# Altium PCB Board.PcbDoc
Units mm, origin at the board's own origin, x right, y up, seen from the top; angles counter-clockwise.
Board outline 38.73 x 19.68 mm, 2 copper layers (Top Layer, Bottom Layer); 19 components, 13 nets, 44 pads, 2 vias.
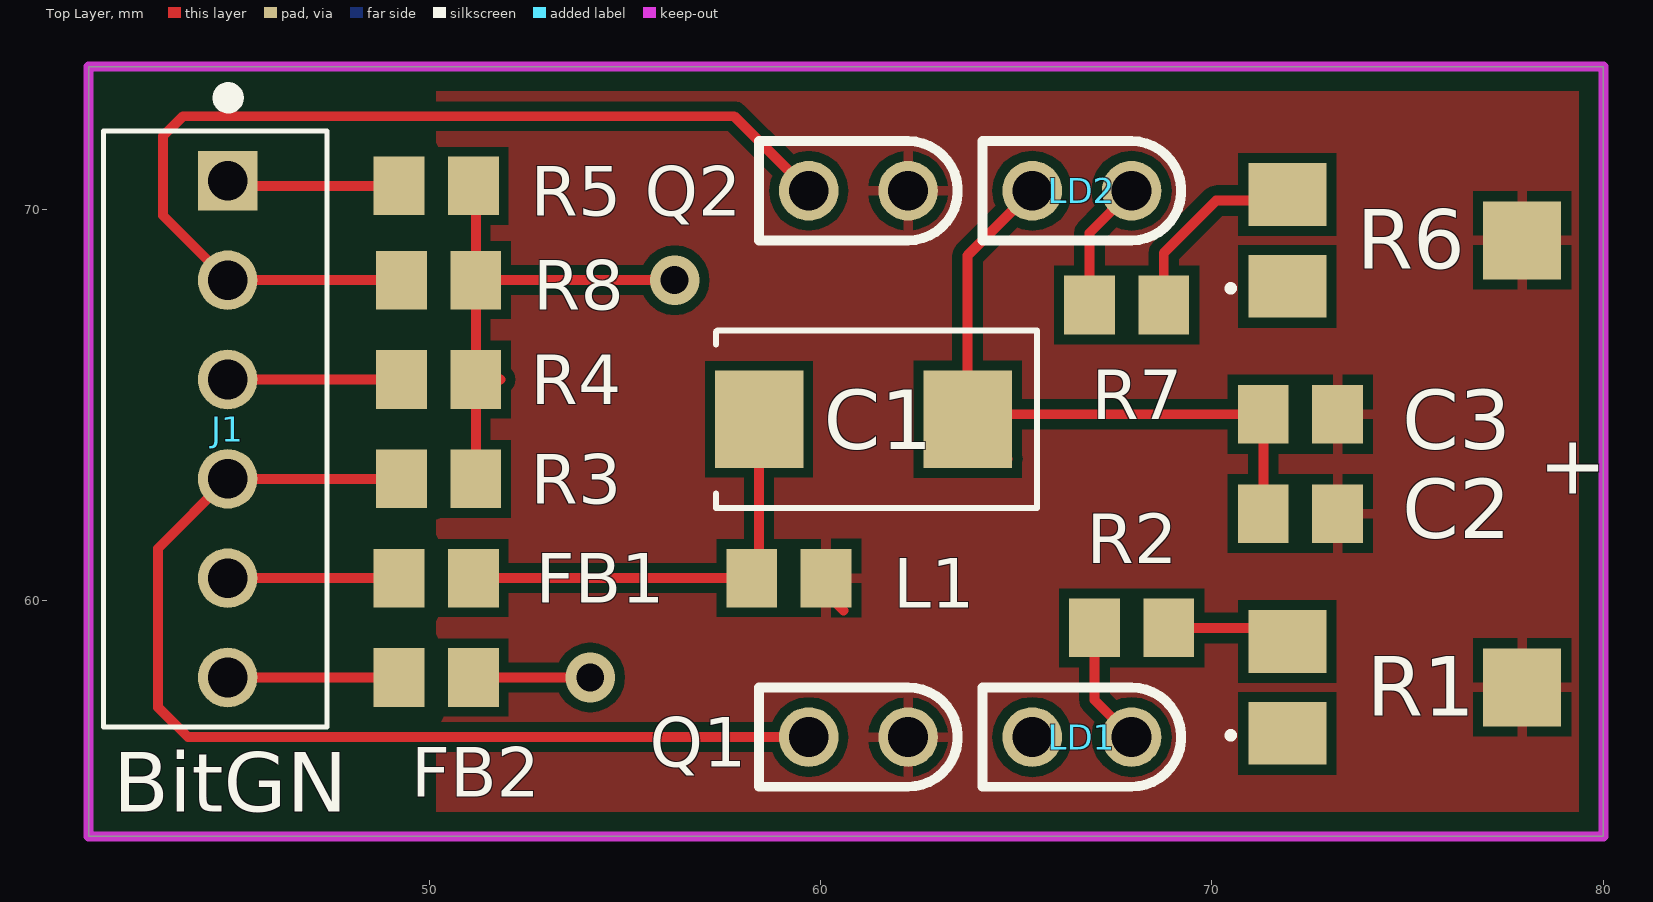
[diagram p0: Top Layer view]
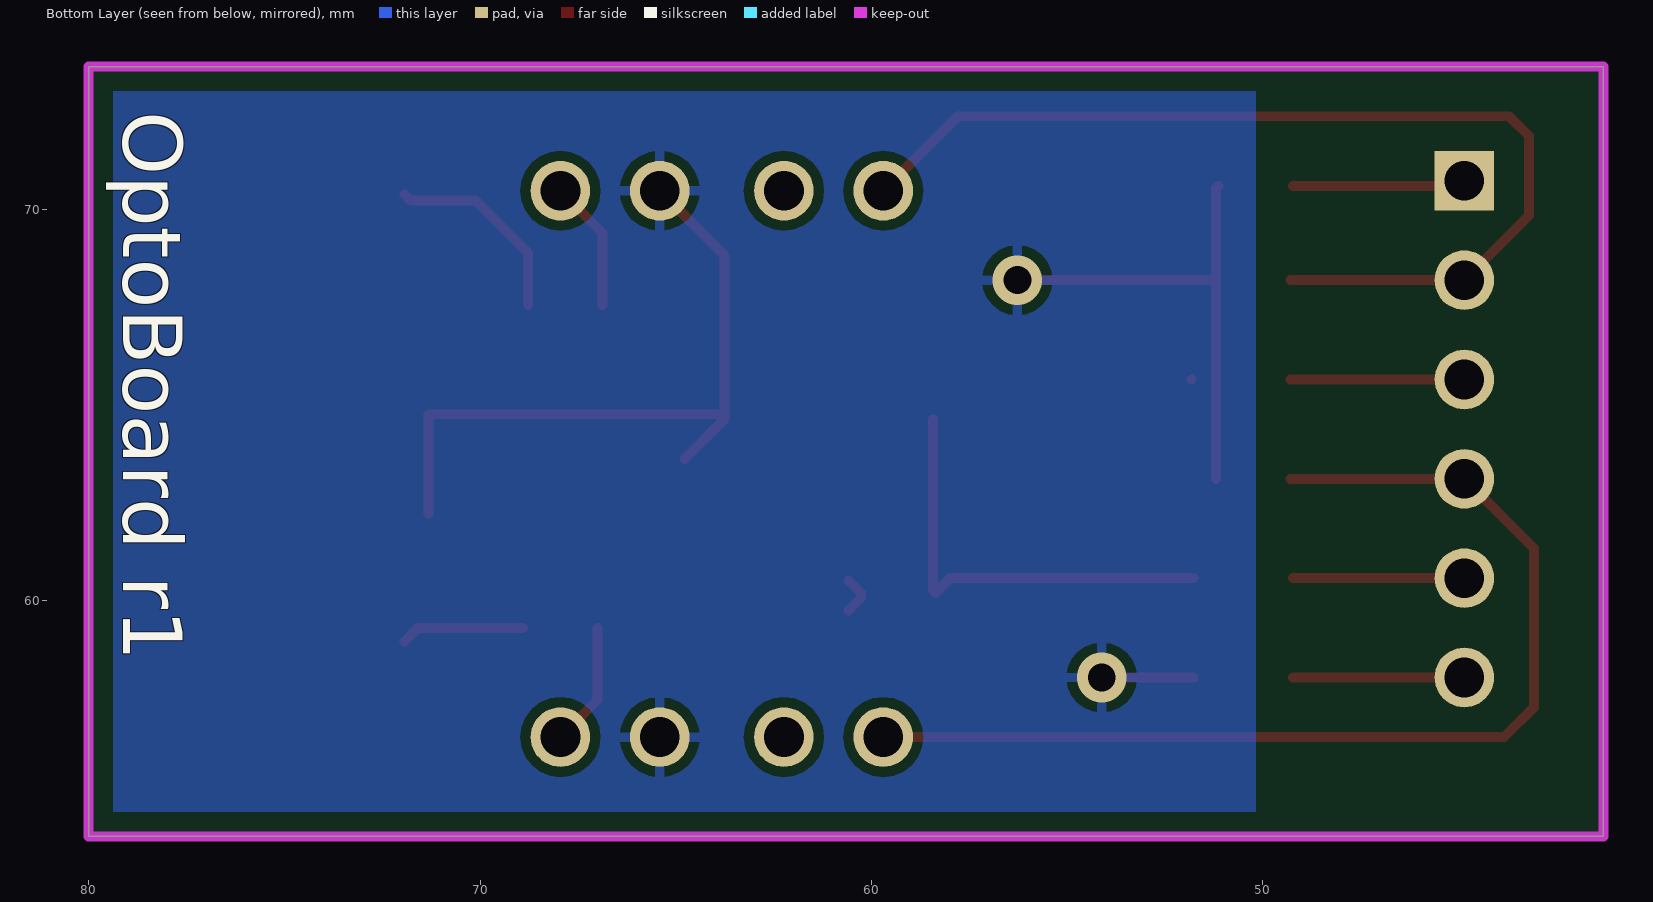
[diagram p1: Bottom Layer view, seen from below]

## Layer stack, top to bottom
Top Solder: solder mask 0.0102, Solder Resist, Dk 3.5
Top Layer: signal copper 0.0356
Dielectric 1: dielectric 0.32, FR-4, Dk 4.8
Bottom Layer: signal copper 0.0356
Bottom Solder: solder mask 0.0102, Solder Resist, Dk 3.5

## Board outline
41.275,53.975 80.01,53.975 80.01,73.66 41.275,73.66

## Design rules (kind name [scope] priority, off if disabled: settings)
Clearance [All] p1: gap=0.254 ignorepadtopadclearanceinfootprint=FALSE except(0: Arc-Hole Track-Hole SMDPad-Hole THPad-Hole Via-Hole Fill-Hole Poly-Hole Region-Hole Text-Hole)
PolygonConnect [All] p1: connectstyle=Relief reliefconductorwidth=0.254 reliefentries=4 polygonreliefangle="90 Angle" airgapwidth=0.254
RoomDefinition Board [InComponentClass('Board')] p1: confinementstyle=ConfineIn formatcopy=TRUE lockcomponents=FALSE outline 41.275,53.975 80.01,53.975 80.01,73.66 41.275,73.66
RoutingVias [All] p1: holewidth=0.711 width=1.27 viastyle="Through Hole" minholewidth=0.711 minwidth=1.27 maxholewidth=0.711 maxwidth=1.27
SolderMaskExpansion [All] p1: expansion=0.102
Width [All] p1: maxlimit=0.254 minlimit=0.254 preferedwidth=0.254
30 further rules are at their usual default settings.

## Components (designator, comment, footprint, x,y, rotation, side; value= is the part's Value field where it differs from the comment)
C1 "Cap Pol1" PCAP7343-43_Keme 61.087,64.643 r0 top value=100pF
C2 "Cap Pol1_1" "805 - CAP Poly" 72.263,62.23 r180 top value=100pF
C3 "Cap Pol1_1" "805 - CAP Poly" 72.263,64.77 r180 top value=100pF
FB1 "Inductor" 805 50.165,60.579 r0 top value=10mH
FB2 "Inductor" 805 50.165,58.039 r0 top value=10mH
J1 "640456-6" TE_640456-6 44.831,64.389 r90 top
L1 "Inductor" 805 59.182,60.579 r0 top value=10mH
LD1 "LTR-4206" LED 66.675,56.515 r180 top
LD2 "LTR-4206" LED 66.675,70.485 r180 top
Q1 "Photo NPN" "IR - TRANS" 60.96,56.515 r180 top
Q2 "Photo NPN" "IR - TRANS" 60.96,70.485 r180 top
R1 "RPot" ST-4EB 74.93,57.785 r270 top value=1K
R2 "Res1" 805 67.945,59.309 r0 top value=1K
R3 "Res1" 805 50.226,63.119 r180 top value=1K
R4 "Res1" 805 50.226,65.659 r180 top value=1K
R5 "Res1" 805 50.165,70.612 r180 top value=1K
R6 "RPot" ST-4EB 74.93,69.215 r270 top value=1K
R7 "Res1" 805 67.818,67.564 r0 top value=1K
R8 "Res1" 805 50.226,68.199 r180 top value=1K

## Footprints (in the part's own frame and the unit in brackets; to place one, negate y for a bottom-side part, rotate by r counter-clockwise, add the part's x,y. Pads: shape width x height; smd on the part's side, far side on the other; paste and mask are expansions set on the pad)
805 [mm] "805 package"
  rect 1.3x1.5 smd: 1(-0.95,0) 2(0.95,0)
"805 - CAP Poly" [mm] "805 package"
  rect 1.3x1.5 smd: 1(-0.95,0) 2(0.95,0)
"IR - TRANS" [mil] "LED placement"
  round 60 hole 40: C(-50,0) E(50,0)
  silkscreen extent -100,-50 100,50
LED [mil] "LED placement"
  round 60 hole 40: A(-50,0) K(50,0)
  silkscreen extent -100,-50 100,50
PCAP7343-43_Keme [mil]
  rect 89x98 smd paste+0 mask+0: 1(-105,0) 2(105,0)
  silkscreen extent -148,-90 175,90
ST-4EB [mm]
  rect 1.6x2 smd: 1(1.175,-3) 3(-1.175,-3)
  rect 2x2 smd: 2(0,3)
  silkscreen extent 1.17,-4.51 1.28,-4.39
TE_640456-6 [mil]
  rect 60x60 hole 40: 1(250,0)
  round 60 hole 40: 2(150,0) 3(50,0) 4(-50,0) 5(-150,0) 6(-250,0)
  silkscreen extent -300,-100 341,125

## Part data
C1: "Polarized Capacitor (Radial)", LatestRevisionDate=17-Jul-2002, LatestRevisionNote="Re-released for DXP Platform.", PackageDescription="Polarized Capacitor (Radial); 2 Leads", PackageReference=RB7.6-15, Published=8-Jun-2000, Publisher="Altium Limited"
C2 C3: "Polarized Capacitor 805", LatestRevisionDate=17-Jul-2002, LatestRevisionNote="Re-released for DXP Platform.", PackageDescription="Polarized Capacitor (Radial); 2 Leads", PackageReference=RB7.6-15, Published=8-Jun-2000, Publisher="Altium Limited"
J1: library part 1x6_6pin_.1_VERTICAL_HEADER, "06P MTA100 HDR ASSY F/L SQ STR", Package=None, Availability=Unavailable, Centerline_Pitch="2.54 mm[.1 in]", EU_RoHS_Compliance=Compliant, MF="TE Connectivity", MP=640456-6, Number_of_Positions=6, Price=None, Product_Type=Connector, SnapEDA_Link=https://www.snapeda.com/parts/640456-6/TE%20Connectivity%20AMP%20Connectors/view-part/?ref=snap, TE_purchase_URL=https://www.te.com/usa-en/product-640456-6.html?te_bu=Cor&te_type=disp&te_campaign=seda_glo_cor-seda-global-disp-prtnr-fy19-seda-model-bom-cta_sma-317_1&elqCampaignId=32493
LD1 LD2: Supplier Part Number 1=160-1988-ND, Supplier 1=Digi-Key
Q1 Q2: "NPN Phototransistor", Code_JEDEC=TO-220-AC, LatestRevisionDate=17-Jul-2002, LatestRevisionNote="Re-released for DXP Platform.", PackageReference=TO-220_A, Published=24-Mar-1999, Publisher="Altium Limited"
R1 R6: "Potentiometer", LatestRevisionDate=17-Jul-2002, LatestRevisionNote="Re-released for DXP Platform.", PackageDescription="Variable Resistor, Thru-Hole; 3 Leads", PackageReference=VR5, Published=8-Jun-2000, Publisher="Altium Limited", Set Position=0.5, Sim Note="Enter the Resistance value and the set point into parameter fields."
R2 R3 R4 R5 R7 R8: "Resistor", LatestRevisionDate=17-Jul-2002, LatestRevisionNote="Re-released for DXP Platform.", PackageDescription="Axial Device, Thru-Hole; 2 Leads; 0.3 in Pin Spacing", PackageReference=AXIAL-0.3, Published=8-Jun-2000, Publisher="Altium Limited"
FB1 FB2 L1: Code_IEC=1005, Code_JEITA=0402, LatestRevisionDate=29-May-2009, LatestRevisionNote="IPC-7351 Footprint Added.", PackageDescription="Chip Inductor", PackageReference=0402-A, Published=8-Jun-2000, Publisher="Altium Limited"

## Via types
v1: diameter 1.27, hole 0.711, Top Layer to Bottom Layer, 2 vias

## Nets (pads, with @x,y where several pads share a name; then routed paths per layer and width w, separated by ;. In a path a pad name is that pad's centre, name@x,y a point inside that pad or via, vN(x,y) a via of type N, cw(c..) or ccw(c..) an arc to the next point about the centre after c; other vN are vias at no path point)
D: C1.2 C2.2 C3.2 FB2.2 LD1.K LD2.K R3.1 R4.1 R5.1 R8.1 | length 33.1
  Top Layer w0.254: R5.1 51.176,70.551 R8.1 ; R3.1 R8.1 ; FB2.2@51.75,58.039 v1(54.102,58.039) ; v1(56.261,68.199) R8.1 ; C1.2@64.77,63.627 C1.2 ; LD2.K 63.754,68.834 C1.2 ; C2.2 C3.2 63.881,64.77 C1.2
M1_P1A+: J1.2 Q2.E R8.2 | length 26.3
  Top Layer w0.254: R8.2 J1.2 43.18,69.85 43.18,71.882 43.688,72.39 57.785,72.39 Q2.E
M1_P1B+: J1.4 Q1.E R3.2 | length 28
  Top Layer w0.254: R3.2 J1.4 43.053,61.341 43.053,57.277 43.815,56.515 Q1.E
NetC1_1: C1.1 FB1.2 L1.1 | length 11.2
  Top Layer w0.254: FB1.2@51.75,60.579 57.978,60.579 58.359,60.198 58.42,60.259 C1.1
NetFB1_1: FB1.1 J1.5 | length 4.4
  Top Layer w0.254: J1.5 FB1.1
NetFB2_1: FB2.1 J1.6 | length 4.4
  Top Layer w0.254: J1.6 FB2.1
NetJ1_1: J1.1 R5.2 | length 4.4
  Top Layer w0.254: J1.1 44.958,70.612 R5.2
NetJ1_3: J1.3 R4.2 | length 4.4
  Top Layer w0.254: J1.3 R4.2
NetLD1_A: LD1.A R2.1 | length 3.2
  Top Layer w0.254: R2.1 66.995,57.465 LD1.A
NetLD2_A: LD2.A R7.1 | length 3.4
  Top Layer w0.254: R7.1 66.868,69.408 LD2.A
NetR1_3: R1.3 R2.2 | length 3.2
  Top Layer w0.254: R2.2 71.581,59.309 R1.3
NetR6_3: R6.3 R7.2 | length 5.1
  Top Layer w0.254: R7.2 68.768,68.895 70.104,70.231 71.771,70.231 R6.3
POPTO: C2.1 C3.1 L1.2 Q1.C Q2.C R1.2 R6.2 | length 1
  Top Layer w0.254: 60.579,59.751 60.259,60.071 60.259,60.198 L1.2@60.579,60.518
pads on no net: R1.1 R6.1

## Polygon pours and split planes (outlines as drawn)
D on Bottom Layer "Bottom Layer-D" (solid, remove dead copper, pour order 4): 50.165,54.61 50.165,73.025 79.375,73.025 79.375,54.61
POPTO on Top Layer "Top Layer - POPTO" (solid, remove dead copper, pour order 8): 50.165,73.025 50.165,54.61 79.375,54.61 79.375,73.025

## Keep-outs
Keep-Out Layer:
  the board outline again, w0.254

## Silkscreen, mask and mechanical layers (free items; w line width, h text height)
Top Overlay:
  text "+" at 78.359,62.738 h1.52
  text "BitGN" at 41.91,54.61 h1.52
Bottom Overlay:
  text "OptoBoard r1" at 79.121,72.517 h1.52 r90

## Dimensions
80.01,73.66 to 80.01,53.975 on Mechanical 13
41.275,73.66 to 80.137,73.66 on Mechanical 13